# EAGLE board BBC_female (EAGLE 9.5.1)
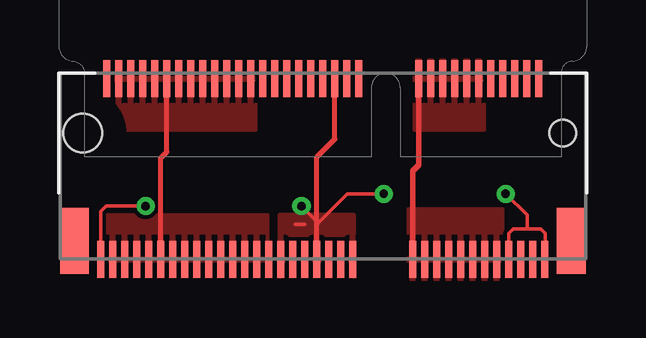
[diagram p0: board, top side]
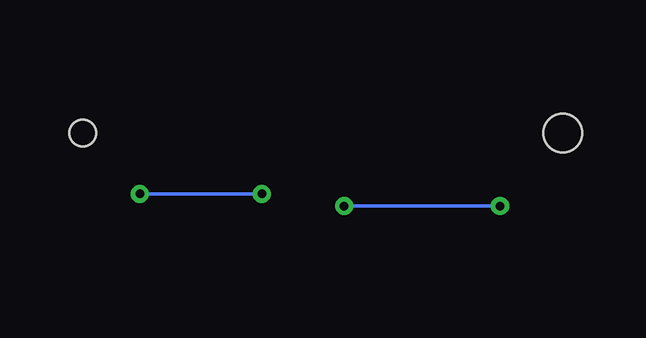
[diagram p1: board, bottom side, seen from below]

No outline drawn. Coordinates in mm, seen from the top.
Copper layers (1*16): Top 0.035mm / dielectric 1.5mm / Bottom 0.035mm
Design rules "default": minimum track width 6mil, minimum drill 0.35mm, track to track 6mil, track to pad 6mil, pad to pad 6mil, via to via 6mil, smd to smd 6mil, copper to edge 40mil, drill to drill 6mil, minimum pad ring 10mil, minimum via ring 8mil, stop-mask expansion 4mil, vias tented up to drill 0mil, thermal gap 10mil

## Footprints (pad centres in the part's own frame; a part is rotated, then mirrored left to right if it is on the bottom)
MICROMOD4222 = smd 0.3 x 1.55: 1 9.25,-5.275; 2 9,2.275; 3 8.75,-5.275; 4 8.5,2.275; 5 8.25,-5.275; 6 8,2.275; 7 7.75,-5.275; 8 7.5,2.275; 9 7.25,-5.275; 10 7,2.275; 11 6.75,-5.275; 12 6.5,2.275; 13 6.25,-5.275; 14 6,2.275; 15 5.75,-5.275; 16 5.5,2.275; 17 5.25,-5.275; 18 5,2.275; 19 4.75,-5.275; 20 4.5,2.275; 21 4.25,-5.275; 22 4,2.275; 23 3.75,-5.275; 32 1.5,2.275; 33 1.25,-5.275; 34 1,2.275; 35 0.75,-5.275; 36 0.5,2.275; 37 0.25,-5.275; 38 0,2.275; 39 -0.25,-5.275; 40 -0.5,2.275; 41 -0.75,-5.275; 42 -1,2.275; 43 -1.25,-5.275; 44 -1.5,2.275; 45 -1.75,-5.275; 46 -2,2.275; 47 -2.25,-5.275; 48 -2.5,2.275; 49 -2.75,-5.275; 50 -3,2.275; 51 -3.25,-5.275; 52 -3.5,2.275; 53 -3.75,-5.275; 54 -4,2.275; 55 -4.25,-5.275; 56 -4.5,2.275; 57 -4.75,-5.275; 58 -5,2.275; 59 -5.25,-5.275; 60 -5.5,2.275; 61 -5.75,-5.275; 62 -6,2.275; 63 -6.25,-5.275; 64 -6.5,2.275; 65 -6.75,-5.275; 66 -7,2.275; 67 -7.25,-5.275; 68 -7.5,2.275; 69 -7.75,-5.275; 70 -8,2.275; 71 -8.25,-5.275; 72 -8.5,2.275; 73 -8.75,-5.275; 74 -9,2.275; 75 -9.25,-5.275 | smd 1.2 x 2.75: A1 10.35,-4.5; A2 -10.35,-4.5 | hole 1.1: 10,0 | hole 1.6: -10,0

## Placement (x,y rotation side)
MM1  [MICROMOD4222]  -24.13,-6.35 0 top

## Library data of the parts
MM1 = Micromod_4222_Female

## Nets
5V: MM1.47 MM1.49 MM1.50 MM1.51 MM1.52 MM1.53 MM1.54 MM1.55 MM1.56 MM1.57 MM1.58 MM1.59 MM1.60 MM1.61 MM1.62 MM1.63 MM1.64 MM1.65 MM1.66 MM1.67 MM1.68 MM1.69 MM1.70 MM1.71 MM1.72 MM1.73
12V: MM1.9 MM1.11 MM1.12 MM1.13 MM1.14 MM1.15 MM1.16 MM1.17 MM1.18 MM1.19 MM1.20 MM1.21 MM1.22 MM1.23
GND: MM1.1 MM1.7 MM1.33 MM1.36 MM1.39 MM1.45 MM1.75

## Tracks (layer width: path | path; a pad name or v marks a point on that pad's centre or on a via)
5V
  Top 0.203: MM1.65 -30.88,-7.38 -30.63,-7.13 MM1.64
  pour Top: -32.89,-3.43 -32.89,-6.22 -26.92,-6.22 -26.92,-3.43
  pour Top: -26.42,-12.32 -26.42,-9.78 -33.15,-9.78 -33.15,-12.32
12V
  Top 0.229: MM1.23 -20.38,-7.93 -20.13,-7.68 MM1.22
  pour Top: -16.64,-12.45 -20.57,-12.45 -20.57,-9.53 -16.64,-9.53
  pour Top: -20.32,-3.3 -20.32,-6.22 -17.4,-6.22 -17.4,-3.3
GND  (via drill 0.35)
  Top 0.152: MM1.75 -33.38,-9.63 -33.15,-9.4 v-31.51,-9.4 | MM1.7 -16.38,-10.54 -16.19,-10.35 -15.62,-10.35 | -15.62,-10.35 -15.05,-10.35 -14.86,-10.54 -14.86,-11.6 MM1.1 | -25.27,-10.16 -24.89,-10.16 | v-25.02,-9.4 -24.38,-10.04 -24.38,-10.16 -23.11,-8.89 v-21.59,-8.89 | v-16.51,-8.89 -15.62,-9.78 -15.62,-10.35
  Top 0.203: MM1.39 -24.38,-10.16 -24.38,-7.36 -23.62,-6.6 -23.62,-4.08 MM1.36
  Bottom 0.152: v-31.51,-9.4 v-25.02,-9.4 | v-21.59,-8.89 v-16.51,-8.89
  pour Top: -25.91,-12.32 -25.91,-9.78 -22.86,-9.78 -22.86,-12.32